# Altium PCB V1.pcbdoc
Units mil, origin at the board's own origin, x right, y up, seen from the top; angles counter-clockwise.
Board outline 2475 x 2490 mil, 2 copper layers (Top Layer, Bottom Layer); 53 components, 59 nets, 207 pads, 49 vias.
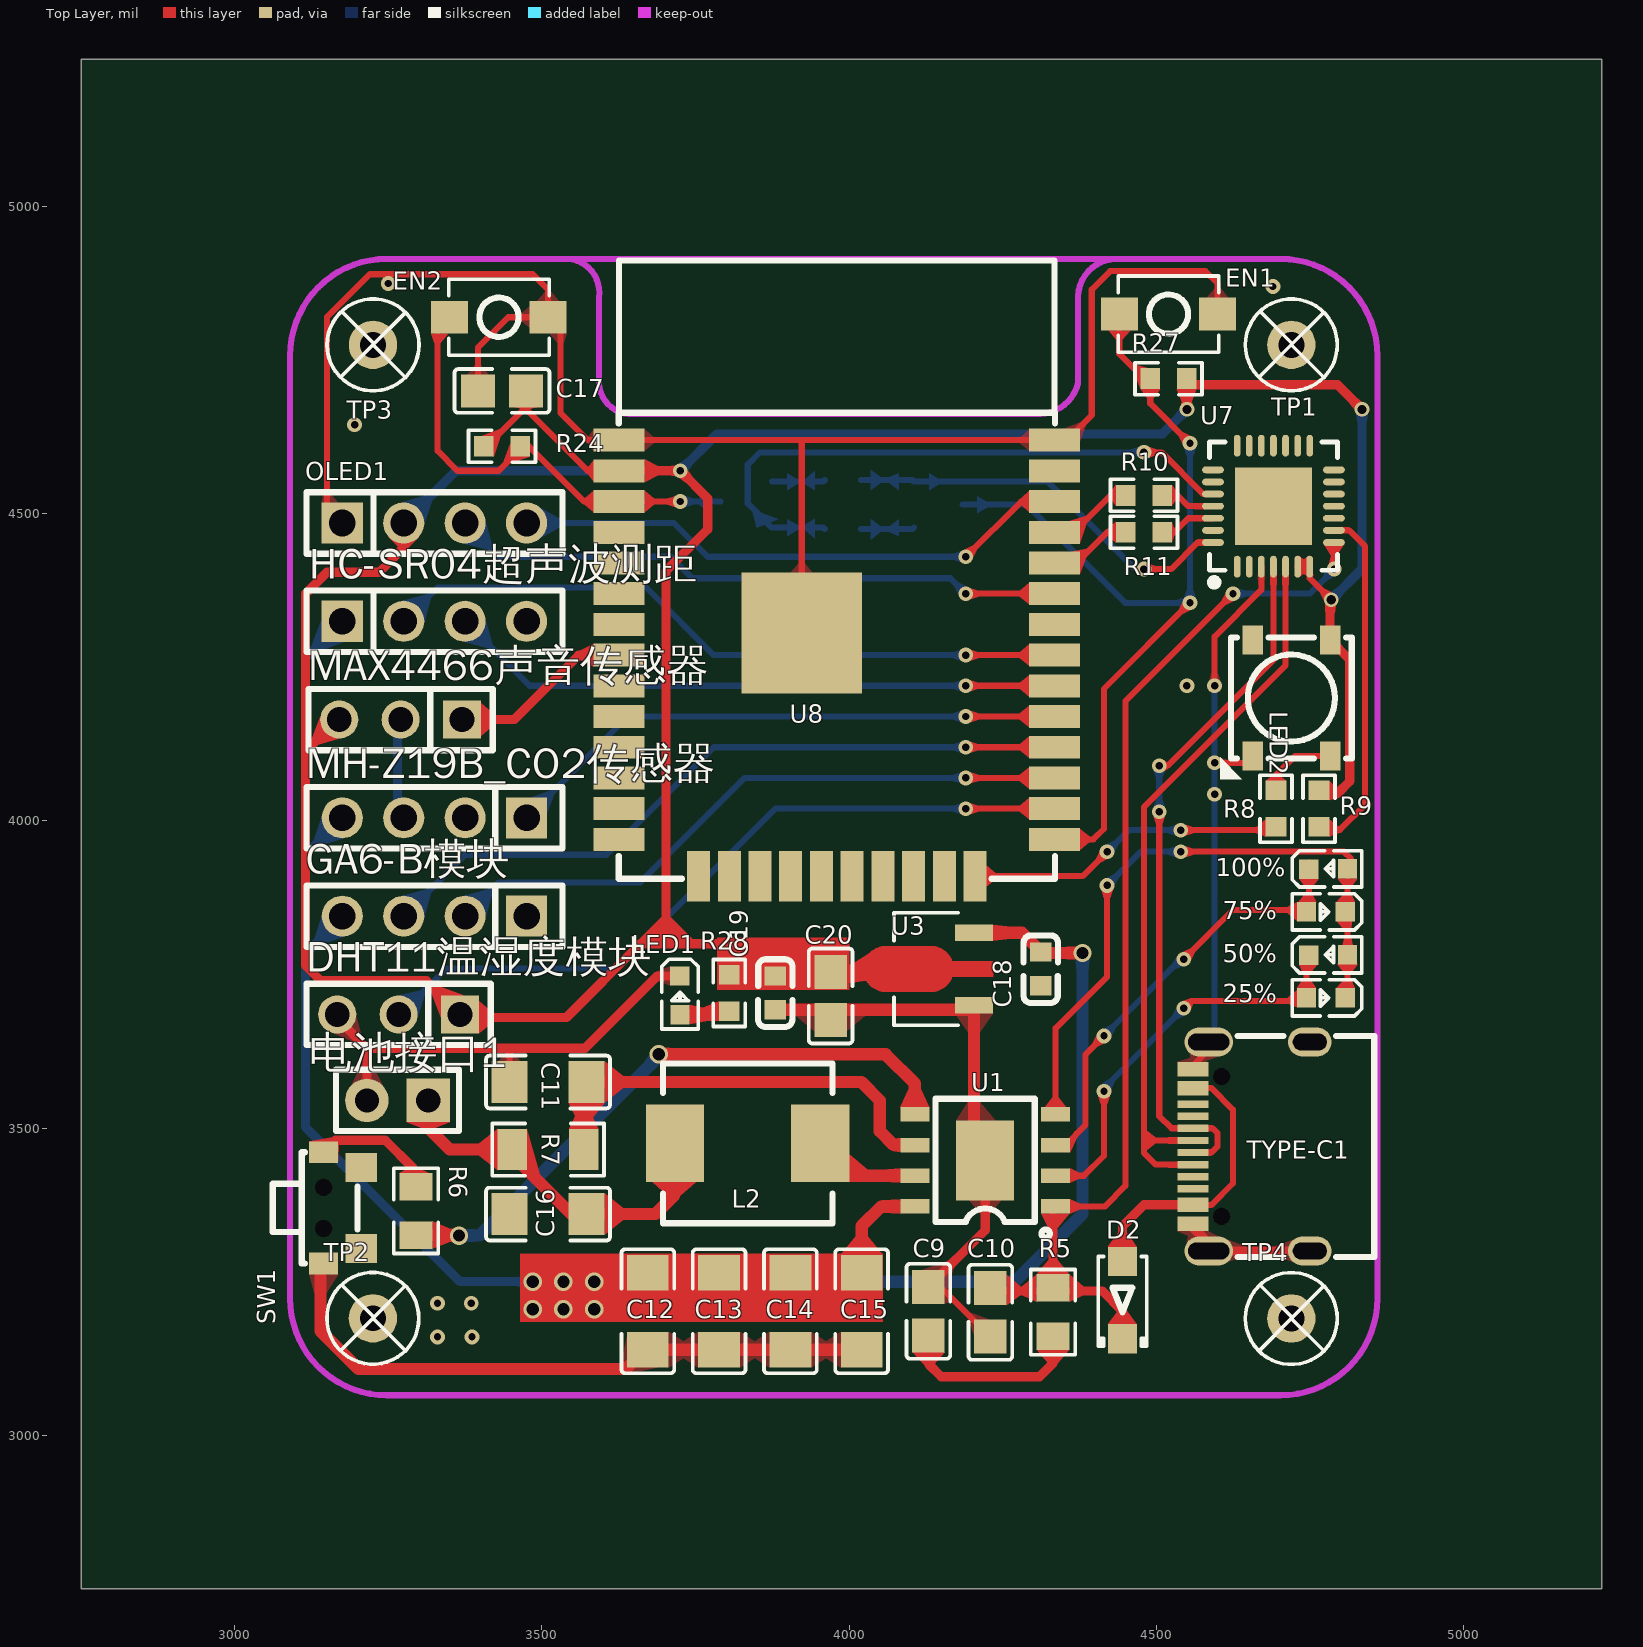
[diagram p0: Top Layer view]
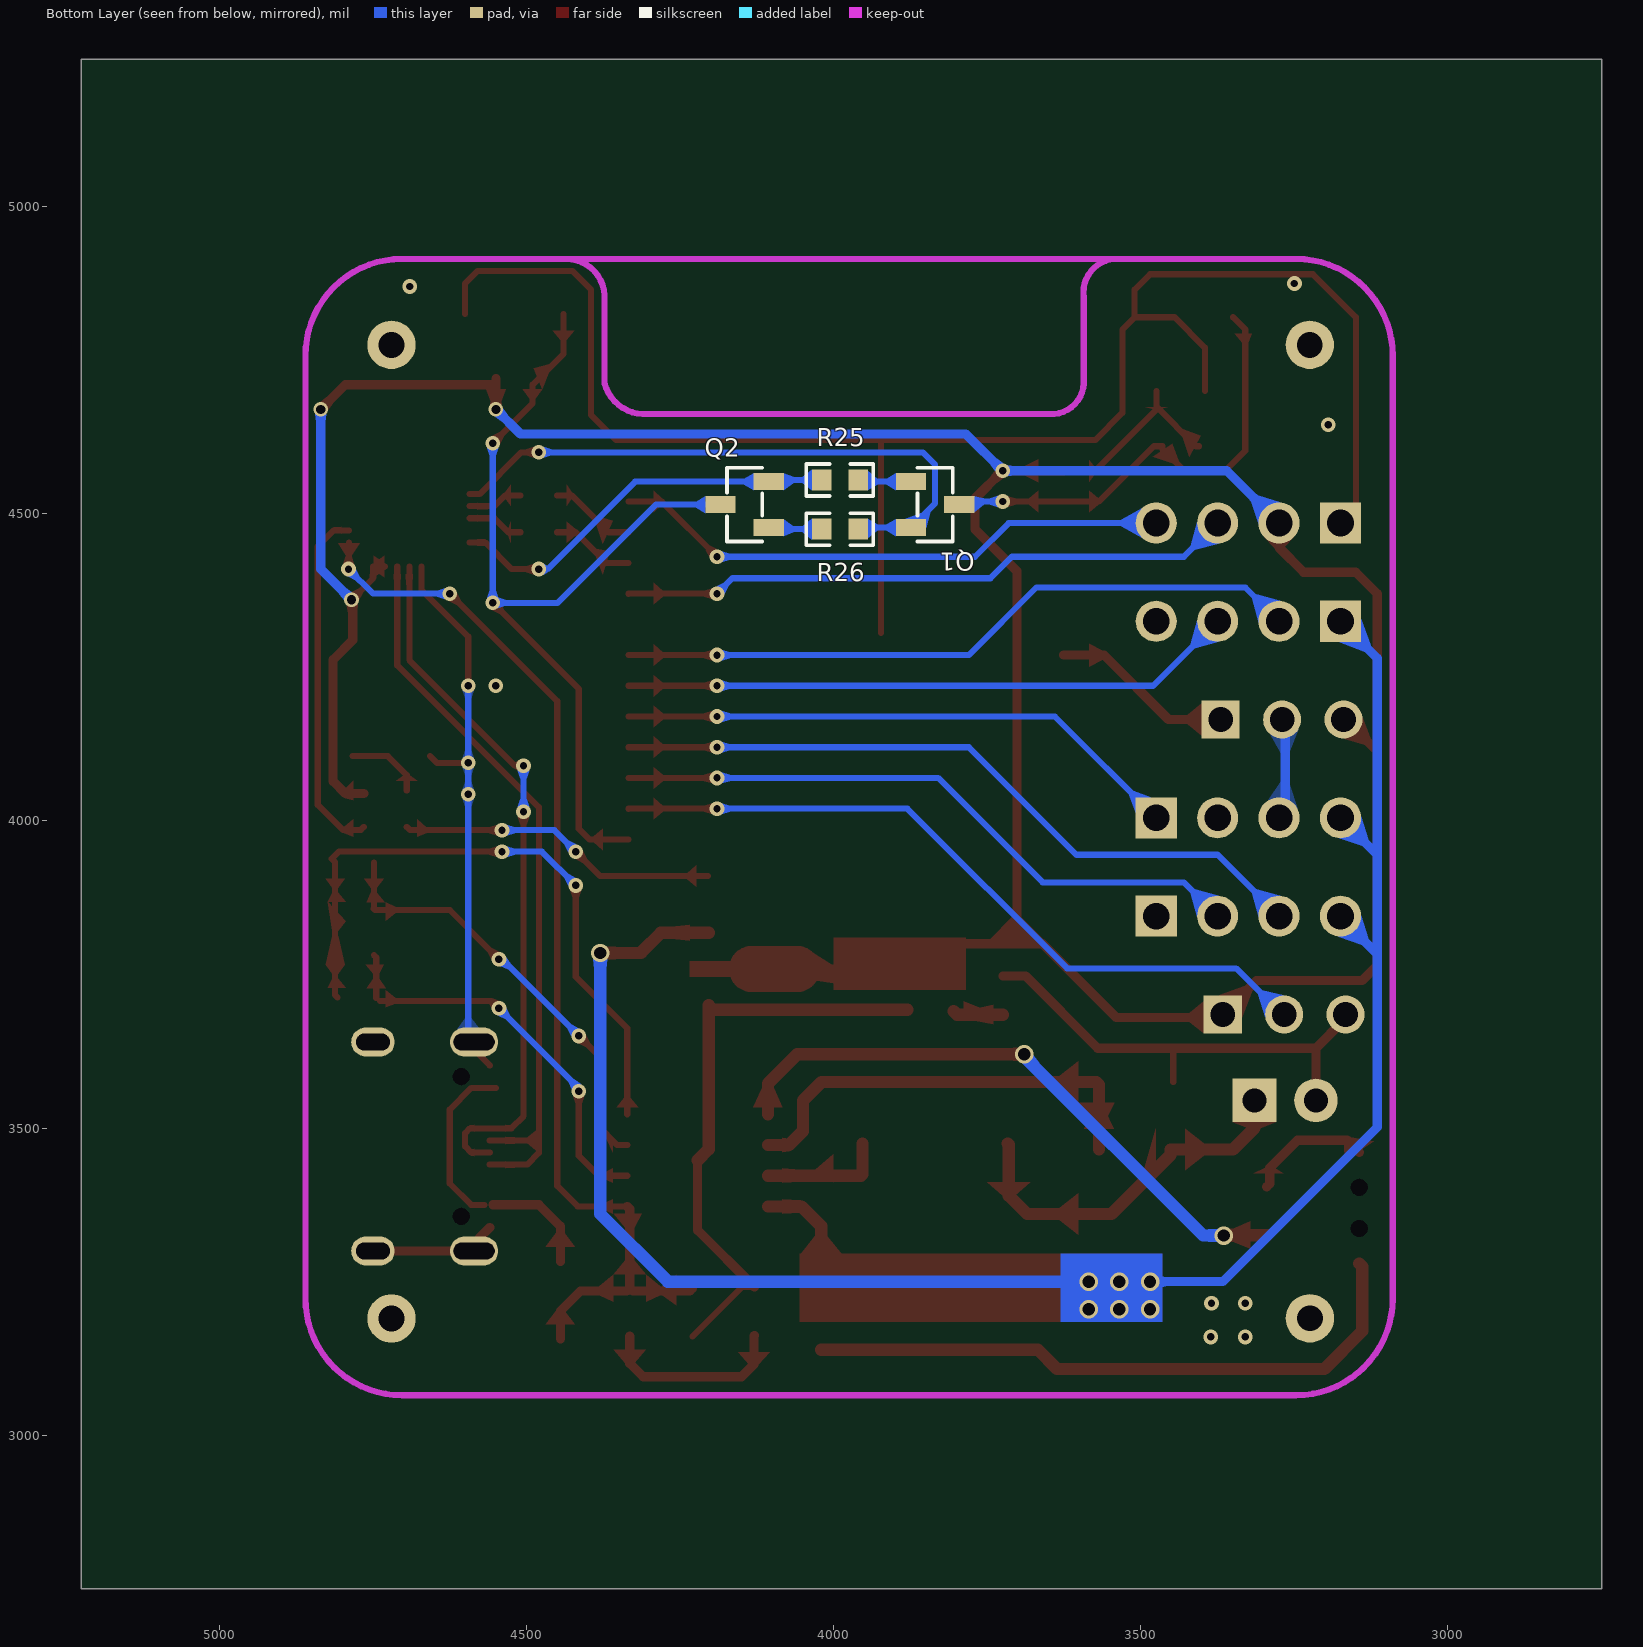
[diagram p1: Bottom Layer view, seen from below]

## Layer stack, top to bottom
Top Layer: signal copper (thickness not stored)
Dielectric: dielectric 12.6, FR-4, Dk 4.8
Bottom Layer: signal copper (thickness not stored)

## Board outline
5225,2750 2750,2750 2750,5240 5225,5240

## Components (designator, comment, footprint, x,y, rotation, side; value= is the part's Value field where it differs from the comment)
25% "19-217/GHC-YR1S2/3T" LED0603-RD 4776.1,3712.16 r180 top
50% "19-217/GHC-YR1S2/3T" LED0603-RD 4780,3781.74 r0 top
75% "19-217/GHC-YR1S2/3T" LED0603-RD 4776.1,3852.16 r180 top
100% "19-217/GHC-YR1S2/3T" LED0603-RD 4780,3921.74 r0 top
C9 "GRM21BR61H106KE43L" C0805 4129.07,3201.82 r270 top
C10 "GRM21BR61H106KE43L" C0805 4230,3200 r90 top
C11 "C3216X5R1V226MTJ00E" C1206 3510,3575 r0 top
C12 "C3216X5R1V226MTJ00E" C1206 3672.41,3201.82 r90 top
C13 "C3216X5R1V226MTJ00E" C1206 3788.44,3201.82 r90 top
C14 "C3216X5R1V226MTJ00E" C1206 3904.46,3201.82 r90 top
C15 "C3216X5R1V226MTJ00E" C1206 4020.49,3201.82 r90 top
C16 "C3216X5R1V226MTJ00E" C1206 3510,3360 r0 top
C17 "GRM21BR61H106KE43L" C0805 3435,4700 r180 top
C18 "104" C0603 4312.07,3758.96 r90 top
C19 "104" C0603 3880,3720 r90 top
C20 "GRM21BR61H106KE43L" C0805 3970,3715 r90 top
D2 "SS14_C2909920" SOD-123FL_L2.8-W1.8-LS3.7-RD 4445,3220 r90 top
DHT11温湿度模块 "B-2200S03P-A120" HDR-TH_3P-P2.54-V-F 3266.73,3685 r180 top
EN1 "TSA343G00-250J2" SW-SMD_L4.0-W2.9-LS5.0 4520,4825 r0 top
EN2 "TSA343G00-250J2" SW-SMD_L4.0-W2.9-LS5.0 3430,4820 r0 top
GA6-B模块 "2.54-1*4P母" HDR-TH_4P-P2.54-V-F 3325,3845 r180 top
HC-SR04超声波测距 "2.54-1*4P母" HDR-TH_4P-P2.54-V-F 3325,4325 r0 top
L2 "FXL0618-1R0-M" IND-SMD_L7.0-W6.6 3835,3475 r180 top
LED1 "19-217/GHC-YR1S2/3T" LED0603-RD 3724.58,3716.1 r270 top
LED2 "WS2812B-V5/W" LED-SMD_L5.0-W5.0-P3.20-LS5.4-TL 4720,4200 r270 top
MAX4466声音传感器 "B-2200S03P-A120" HDR-TH_3P-P2.54-V-F 3270,4165 r180 top
MH-Z19B_CO2传感器 "2.54-1*4P母" HDR-TH_4P-P2.54-V-F 3325,4005 r180 top
OLED1 "2.54-1*4P母" HDR-TH_4P-P2.54-V-F 3325,4485 r0 top
Q1 "S8050" SOT-23-3_L2.9-W1.3-P1.90-LS2.4-BR 3835,4515 r0 bottom
Q2 "S8050" SOT-23-3_L2.9-W1.3-P1.90-LS2.4-BR 4145,4515 r180 bottom
R5 "0805W8F200KT5E" R0805 4331.88,3200.56 r90 top
R6 "0805W8F1002T5E_C17414" R0805 3295,3365 r270 top
R7 "1206W4F500LT5E" R1206 3510,3465 r180 top
R8 "0603WAF0000T5E" R0603 4695,4020 r270 top
R9 "0603WAF4701T5E" R0603 4765,4020 r270 top
R10 "0603WAF1001T5E" R0603 4480,4530 r180 top
R11 "0603WAF1001T5E" R0603 4480,4470 r180 top
R24 "0603WAF1002T5E" R0603 3435,4610 r0 top
R25 "0603WAF1002T5E" R0603 3990,4555 r0 bottom
R26 "0603WAF1002T5E" R0603 3990,4475 r180 bottom
R27 "0603WAF1002T5E" R0603 4520,4720 r0 top
R28 "0603WAF1001T5E" R0603 3805,3720 r90 top
SW1 "TS24CA" SW-SMD_TS24CA 3175,3370 r90 top
TP1 "M2螺丝" M2螺丝 4720,4775 r0 top
TP2 "M2螺丝" M2螺丝 3224.8,3190.35 r0 top
TP3 "M2螺丝" M2螺丝 3225,4775 r0 top
TP4 "M2螺丝" M2螺丝 4720,3190 r0 top
TYPE-C1 "KH-TYPE-C-16P" USB-C-SMD_KH-TYPE-C-16P 4655,3470 r90 top
U1 "IP5306" ESOP-8_L4.9-W3.9-P1.27-LS6.0-BL-EP 4221.59,3447.41 r90 top
U3 "AMS1117-3.3_C880752" SOT-89-3_L4.5-W2.5-P1.50-LS4.2-BR 4149.95,3758.98 r0 top
U7 "CP2102-GMR" WQFN-28_L5.0-W5.0-P0.50-BL-EP3.2 4690.88,4512.41 r0 top
U8 "ESP32-WROOM-32D" WIFIM-SMD_ESP32-WROOM-32D 3980,4265 r270 top
电池接口1 "826629-2" HDR-TH_2P-P2.54-V-M-1 3265,3545 r180 top

## Footprints (in the part's own frame and the unit in brackets; to place one, negate y for a bottom-side part, rotate by r counter-clockwise, add the part's x,y. Pads: shape width x height; smd on the part's side, far side on the other; paste and mask are expansions set on the pad)
C0603 [mm]
  rect 0.8x0.9 smd paste+0 mask+0.051: 1(-0.7,0) 2(0.7,0)
  silkscreen extent -1.41,-0.71 1.39,0.72
C0805 [mm]
  rect 1.41x1.35 smd paste-100 mask+0.051: 1(-1,0) 2(1,0)
  silkscreen extent -1.96,-0.9 1.96,0.9
C1206 [mm]
  rect 1.485x1.728 smd paste-100 mask+0.051: 1(-1.593,0) 2(1.593,0)
  silkscreen extent -2.56,-1.09 2.56,1.09
ESOP-8_L4.9-W3.9-P1.27-LS6.0-BL-EP [mm]
  rect 0.6x1.2 smd paste+0 mask+0.051: 1(-1.905,-2.908) 2(-0.635,-2.908) 3(0.635,-2.908) 4(1.905,-2.908) 5(1.905,2.908) 6(0.635,2.908) 7(-0.635,2.908) 8(-1.905,2.908)
  rect 3.3x2.4 smd paste+0 mask+0.051: 9(0,0)
  silkscreen extent -3.2,-2.67 2.55,2.05
HDR-TH_2P-P2.54-V-M-1 [mm]
  rect 1.8x1.8 hole 1 paste+0 mask+0.051: 1(-1.27,0)
  round 1.8 hole 1 paste+0 mask+0.051: 2(1.27,0)
  silkscreen extent -2.54,-1.27 2.54,1.27
HDR-TH_3P-P2.54-V-F [mil]
  rect 62x62 hole 40.16 paste+0 mask+2: 1(-100,0)
  round 62 hole 40.16 paste+0 mask+2: 2(0,0) 3(100,0)
  silkscreen extent -150,-50 150,50
HDR-TH_4P-P2.54-V-F [mm]
  rect 1.7x1.7 hole 1.1 paste+0 mask+0.051: 1(-3.81,0)
  round 1.7 hole 1.1 paste+0 mask+0.051: 2(-1.27,0) 3(1.27,0) 4(3.81,0)
  silkscreen extent -5.29,-1.27 5.29,1.27
IND-SMD_L7.0-W6.6 [mm]
  rect 2.4x3.2 smd paste+0 mask+0.051: 1(-3,0) 2(3,0)
  silkscreen extent -3.5,-3.3 3.5,3.3
LED0603-RD [mm]
  rect 0.8x0.8 smd paste+0 mask+0.051: 1(-0.799,-0.003) 2(0.799,0.003)
  silkscreen extent -1.49,-0.75 1.39,0.76
LED-SMD_L5.0-W5.0-P3.20-LS5.4-TL [mm]
  rect 1.2x0.85 smd paste+0 mask+0.051: 1(-2.4,1.6) 2(-2.4,-1.6) 3(2.4,1.6) 4(2.4,-1.6)
  silkscreen extent -2.5,-2.95 3.35,2.5
M2螺丝 [mm]
  round 2 hole 1.07 mask+0.051: 1(0,0)
  silkscreen extent -1.9,-1.9 1.9,1.9
R0603 [mil]
  rect 31.75x34.02 smd paste-3937.01 mask+2: 1(-29.66,0) 2(29.66,0)
  silkscreen extent -55,-26 55,26
R0805 [mm]
  rect 1.133x1.377 smd paste-100 mask+0.051: 1(-1,0) 2(1,0)
  silkscreen extent -1.76,-0.92 1.76,0.92
R1206 [mil]
  rect 47.54x66.97 smd paste-3937.01 mask+2: 1(-58.22,0) 2(58.22,0)
  silkscreen extent -91,-42 91,42
SOD-123FL_L2.8-W1.8-LS3.7-RD [mm]
  rect 1.2x1.2 smd paste+0 mask+0.051: 1(-1.6,0) 2(1.6,0)
  silkscreen extent -1.9,-1 1.8,1
SOT-23-3_L2.9-W1.3-P1.90-LS2.4-BR [mm]
  rect 1.25x0.7 smd paste+0 mask+0.051: 1(1,-0.95) 2(1,0.95) 3(-1,0)
  silkscreen extent -0.73,-1.53 0.73,1.53
SOT-89-3_L4.5-W2.5-P1.50-LS4.2-BR [mm]
  rect 1.575x0.672 smd paste+0 mask+0.051: 1(1.356,-1.5) 3(1.356,1.5)
  Top Layer region: -2.283,0.95 -0.429,0.95 -0.384,0.949 -0.34,0.946 -0.296,0.94 -0.252,0.933 -0.208,0.924 -0.165,0.912 -0.123,0.899 -0.081,0.884 -0.04,0.866 0,0.847 0.04,0.826 0.078,0.803 0.115,0.779 0.151,0.752 0.185,0.724 0.219,0.695 0.251,0.664 0.281,0.631 0.31,0.597 0.337,0.562 0.362,0.525 0.386,0.488 0.408,0.449 0.428,0.409 0.447,0.33 2.144,0.33 2.144,-0.33 0.447,-0.33 0.428,-0.409 0.408,-0.449 0.386,-0.488 0.362,-0.526 0.337,-0.562 0.31,-0.597 0.281,-0.631 0.251,-0.664 0.219,-0.695 0.185,-0.725 0.151,-0.753 0.115,-0.779 0.078,-0.804 0.04,-0.827 0,-0.848 -0.04,-0.867 -0.081,-0.884 -0.123,-0.899 -0.165,-0.913 -0.208,-0.924 -0.252,-0.934 -0.296,-0.941 -0.34,-0.946 -0.384,-0.949 -0.429,-0.95 -2.283,-0.95 -2.328,-0.949 -2.372,-0.946 -2.416,-0.941 -2.46,-0.934 -2.504,-0.924 -2.547,-0.913 -2.589,-0.899 -2.631,-0.884 -2.672,-0.867 -2.713,-0.848 -2.752,-0.827 -2.79,-0.804 -2.827,-0.779 -2.863,-0.753 -2.898,-0.725 -2.931,-0.695 -2.963,-0.664 -2.993,-0.631 -3.022,-0.597 -3.049,-0.562 -3.075,-0.526 -3.098,-0.488 -3.12,-0.449 -3.141,-0.409 -3.159,-0.369 -3.175,-0.327 -3.189,-0.285 -3.202,-0.242 -3.212,-0.199 -3.22,-0.155 -3.227,-0.111 -3.231,-0.067 -3.233,-0.022 -3.233,0.022 -3.231,0.067 -3.227,0.111 -3.22,0.155 -3.212,0.199 -3.202,0.242 -3.189,0.285 -3.175,0.327 -3.159,0.369 -3.141,0.409 -3.12,0.449 -3.098,0.488 -3.075,0.525 -3.049,0.562 -3.022,0.597 -2.993,0.631 -2.963,0.664 -2.931,0.695 -2.898,0.724 -2.863,0.752 -2.827,0.779 -2.79,0.803 -2.752,0.826 -2.713,0.847 -2.672,0.866 -2.631,0.884 -2.589,0.899 -2.547,0.912 -2.504,0.924 -2.46,0.933 -2.416,0.94 -2.372,0.946 -2.328,0.949
  silkscreen extent -1.95,-2.33 0.7,2.33
SW-SMD_L4.0-W2.9-LS5.0 [mm]
  rect 1.53x1.36 smd paste+0 mask+0.051: 1(-2.035,0) 2(2.035,0)
  silkscreen extent -2.08,-1.58 2.08,1.58
SW-SMD_TS24CA [mm]
  rect 0.9x1.2 smd paste+0 mask+0.051: 1(-2.3,0.775) 2(2.3,0.775)
  rect 1.2x1.3 smd paste+0 mask+0.051: 3(-1.675,-0.775) 4(1.675,-0.775)
  Multi-Layer board cut-out: -0.85,0.425 -0.698,0.46 -0.576,0.557 -0.509,0.697 -0.509,0.853 -0.576,0.993 -0.698,1.09 -0.85,1.125 -0.85,1.125 -1.002,1.09 -1.124,0.993 -1.191,0.853 -1.191,0.697 -1.124,0.557 -1.002,0.46 -0.85,0.425
  Multi-Layer board cut-out: 0.85,0.425 1.002,0.46 1.124,0.557 1.191,0.697 1.191,0.853 1.124,0.993 1.002,1.09 0.85,1.125 0.85,1.125 0.698,1.09 0.576,0.993 0.509,0.853 0.509,0.697 0.576,0.557 0.698,0.46 0.85,0.425
  silkscreen extent -2.3,-0.62 2.3,2.88
USB-C-SMD_KH-TYPE-C-16P [mm]
  oval 1.2x2 hole 0.7 slot 1.7 at 90 deg paste+0 mask+0.051: 1(-4.32,1.765) 2(4.32,1.765)
  oval 1.2x1.8 hole 0.7 slot 1.4 at 90 deg paste+0 mask+0.051: 3(-4.32,-2.415) 4(4.32,-2.415)
  rect 0.3x1.3 smd paste-100 mask+0.05: A1(-3.35,2.415) A4(-2.55,2.415) A5(-1.25,2.415) A6(-0.25,2.415) A7(0.25,2.415) A8(1.25,2.415) A9(2.55,2.415) A12(3.35,2.415) B1(3.05,2.415) B4(2.25,2.415) B5(1.75,2.415) B6(0.75,2.415) B7(-0.75,2.415) B8(-1.75,2.415) B9(-2.25,2.415) B12(-3.05,2.415)
  Multi-Layer board cut-out: -2.89,0.885 -2.738,0.92 -2.616,1.017 -2.549,1.157 -2.549,1.313 -2.616,1.453 -2.738,1.55 -2.89,1.585 -2.89,1.585 -3.042,1.55 -3.164,1.453 -3.231,1.313 -3.231,1.157 -3.164,1.017 -3.042,0.92 -2.89,0.885
  Multi-Layer board cut-out: 2.89,0.885 3.042,0.92 3.164,1.017 3.231,1.157 3.231,1.313 3.164,1.453 3.042,1.55 2.89,1.585 2.89,1.585 2.738,1.55 2.616,1.453 2.549,1.313 2.549,1.157 2.616,1.017 2.738,0.92 2.89,0.885
  silkscreen extent -4.57,-5.08 4.57,0.57
WIFIM-SMD_ESP32-WROOM-32D [mm]
  rect 0.95x2.1 smd paste+0 mask+0.051: 1(-9.015,-9) 2(-7.745,-9) 3(-6.475,-9) 4(-5.205,-9) 5(-3.935,-9) 6(-2.665,-9) 7(-1.395,-9) 8(-0.125,-9) 9(1.145,-9) 10(2.415,-9) 11(3.685,-9) 12(4.955,-9) 13(6.225,-9) 14(7.495,-9) 25(7.495,9) 26(6.225,9) 27(4.955,9) 28(3.685,9) 29(2.415,9) 30(1.145,9) 31(-0.125,9) 32(-1.395,9) 33(-2.665,9) 34(-3.935,9) 35(-5.205,9) 36(-6.475,9) 37(-7.745,9) 38(-9.015,9)
  rect 2.1x0.95 smd paste+0 mask+0.051: 15(9.015,-5.715) 16(9.015,-4.445) 17(9.015,-3.175) 18(9.015,-1.905) 19(9.015,-0.635) 20(9.015,0.635) 21(9.015,1.905) 22(9.015,3.175) 23(9.015,4.445) 24(9.015,5.715)
  rect 5x5 smd paste+0 mask+0.051: 39(-1.045,-1.45)
  silkscreen extent -16.44,-9.02 9.12,9.02
WQFN-28_L5.0-W5.0-P0.50-BL-EP3.2 [mm]
  oval 0.28x0.9 smd paste-100 mask+0.051: 1(-1.501,-2.5) 2(-1.001,-2.5) 3(-0.501,-2.5) 4(0,-2.5) 5(0.5,-2.5) 6(1.001,-2.5) 7(1.501,-2.5) 15(1.501,2.5) 16(1.001,2.5) 17(0.5,2.5) 18(0,2.5) 19(-0.501,2.5) 20(-1.001,2.5) 21(-1.501,2.5)
  oval 0.9x0.28 smd paste-100 mask+0.051: 8(2.5,-1.501) 9(2.5,-1.001) 10(2.5,-0.501) 11(2.5,0) 12(2.5,0.5) 13(2.5,1.001) 14(2.5,1.501) 22(-2.5,1.501) 23(-2.5,1.001) 24(-2.5,0.5) 25(-2.5,0) 26(-2.5,-0.501) 27(-2.5,-1.001) 28(-2.5,-1.501)
  rect 3.2x3.2 smd paste-100 mask+0.051: 29(0,0)
  silkscreen extent -2.65,-3.3 2.65,2.65

## Via types
v1: diameter 24, hole 12, Top Layer to Bottom Layer, 35 vias
v2: diameter 30, hole 20, Top Layer to Bottom Layer, 9 vias
v3: diameter 24, hole 15, Top Layer to Bottom Layer, 3 vias
v4: diameter 24.02, hole 12.01, Top Layer to Bottom Layer, 2 vias

## Nets (pads, with @x,y where several pads share a name; then routed paths per layer and width w, separated by ;. In a path a pad name is that pad's centre, name@x,y a point inside that pad or via, vN(x,y) a via of type N, cw(c..) or ccw(c..) an arc to the next point about the centre after c; other vN are vias at no path point)
3V3: C17.1 C19.2 C20.2 DHT11温湿度模块.1 LED2.1 MAX4466声音传感器.3 OLED1.2 R9.1 R24.1 R27.2 R28.2 U7.6 U7.7 U8.2 | length 5744.1
  Top Layer w10: R24.1 3410.34,4610 C17.1@3474.37,4674.03 ; C17.1 C17.1@3474.37,4674.03 ; U8.2 3574.33,4569.93 3474.37,4669.89 C17.1@3474.37,4674.03 ; U7.6 U7.7 4749.97,4395.03 v3(4785,4360) ; v3@4835,4665 v3(4835,4670)
  Top Layer w15: MAX4466声音传感器.3@3166.73,4165 3115,4113.27 ; OLED1.2 3275,4445 3235,4405 3150,4405 3115,4370 3115,4113.27 ; DHT11温湿度模块.1@3345,3680 3540,3680 3660,3800 3701.79,3800 ; DHT11温湿度模块.1 3311.73,3740 3140,3740 3115,3765 3115,4113.27 ; U8.2 3724.93,4569.93 v1(3725,4570) 3770,4525 3770,4475 3701.79,4406.79 3701.79,3800 ; 3820,3800 3701.79,3800 ; R27.2 R27.2@4549.66,4710 ; v3(4550,4670) 4549.66,4670.34 R27.2@4549.66,4710 ; R9.1@4765,4044.66 4795,4044.66 4815,4064.66 4815,4262.48 LED2.1 4782.99,4357.99 v3(4785,4360) ; v3(4835,4670) 4795,4710 R27.2@4549.66,4710
  Top Layer w20: R28.2 4087.24,3749.66 4096.56,3758.97
  Bottom Layer w15: OLED1.2 3360,4570 v1(3725,4570) 3785,4630 4510,4630 v3(4550,4670) ; v3(4785,4360) 4835,4410 v3(4835,4670)
5V: C10.2 D2.1 R5.2 U1.1 U7.8 | length 1813.5
  Top Layer w10: U1.1 4416.71,3372.41 4450,3405.7 4450,4195 v1(4625,4370) ; U7.8 4789.3,4405 4790,4405.7 v1(4790,4410)
  Top Layer w15: C10.2 4234.44,3234.93 4326.88,3234.93 R5.2 ; U1.1 4331.88,3368.21 R5.2 ; D2.1 4445,3202.01 4412.07,3234.93 4336.88,3234.93 R5.2
  Bottom Layer w10: v1(4625,4370) 4750,4370 v1(4790,4410)
$1N559: R6.2 U1.5 | length 1006.2
  Top Layer w20: R6.2 3364.37,3325.63 v2(3365,3325) ; v2(3690,3620) 4059.5,3620 4107.09,3572.41 U1.5
  Bottom Layer w20: v2(3365,3325) 3398.28,3325 3690,3616.72 v2(3690,3620)
$1N562: C11.2 R7.1 U1.6 | length 718
  Top Layer w20: R7.1 3568.22,3570.52 C11.2 4020,3575 4050,3545 4050,3495 4072.59,3472.41 U1.6
$1N563: L2.1 U1.7 | length 205.1
  Top Layer w20: L2.1 3953.11,3425 3955.69,3422.41 U1.7
$1N566: C9.2 R5.1 | length 311.4
  Top Layer w15: C9.2 4130,3161.52 4130,3115 4150,3095 4310,3095 4331.88,3116.88 R5.1
$1N567: 25%.2 50%.1 U1.2 | length 656.2
  Top Layer w10: U1.2 4382.41,3422.41 4415,3455 v1(4415,3560) ; v1(4545,3695) 4557.03,3707.03 25%.2@4738.72,3707.03 ; 25%.2 4744.62,3777.7 50%.1
  Bottom Layer w10: v1(4415,3560) 4415,3565 v1(4545,3695)
$1N568: 75%.2 100%.1 U1.3 | length 714.8
  Top Layer w10: U1.3 4352.41,3472.41 4385,3505 4385,3620 v1(4415,3650) ; v1(4545,3775) 4625,3855 4746.7,3855 75%.2@4748.72,3857.03 ; 75%.2@4748.52,3857.03 100%.1 100%.1@4748.52,3932.5
  Bottom Layer w10: v1(4415,3650) 4540,3775 v1(4545,3775)
$1N569: 25%.1 50%.2 75%.1 100%.2 U1.4 | length 1062.2
  Top Layer w10: U1.4 4336.09,3662.41 4420,3746.32 v1(4420,3895) ; v1(4540,3950) 4805.58,3950 4817.14,3938.44 4811.67,3932.97 4811.67,3716.4 25%.1
  Bottom Layer w10: v1(4420,3895) 4475,3950 v1(4540,3950)
$1N570: R6.1 SW1.2 | length 204.9
  Top Layer w15: SW1.2 3163.94,3480 3245,3480 3290,3435 3290,3409.37 R6.1
$1N4383: R9.2 U7.9 | length 576.3
  Top Layer w10: R9.2 4770,3985.34 4799.14,3985.34 4840,4026.2 4840,4447.03 4814.02,4473.01 U7.9
$1N4471: R10.1 U7.25 | length 90.1
  Top Layer w10: R10.1 4534.66,4530 4552.25,4512.41 U7.25
$1N4541: R11.1 U7.26 | length 92.2
  Top Layer w10: R11.1 4529.66,4470 4552.37,4492.71 U7.26
$1N5646: Q1.1 R25.1 | length 87
  Bottom Layer w10: Q1.1 3957.74,4552.4 R25.1
$1N5682: Q2.1 R26.1 | length 87
  Bottom Layer w10: R26.1 4103.03,4475 Q2.1
$1N8242: LED1.2 R28.1 | length 82.7
  Top Layer w20: LED1.2 3799.28,3684.62 R28.1
$1N8352: LED2.3 R8.1 | length 125.8
  Top Layer w10: R8.1 4695,4074.66 4725.85,4105.51 LED2.3
CLK: U8.20
CMD: U8.19
D+: TYPE-C1.A6 TYPE-C1.B6 U7.4 | length 1152.1
  Top Layer w10: v4(4505,4015) 4505,3519.45 4524.92,3499.53 TYPE-C1.B6 4592.2,3499.53 4600,3491.73 4600,3470.16 4590,3460.16 TYPE-C1.A6 ; v4(4505,4090) 4519.14,4090 4690.87,4261.73 U7.4
  Bottom Layer w10: v4(4505,4015) v4(4505,4090)
D-: TYPE-C1.A7 TYPE-C1.B7 U7.5 | length 1217.7
  Top Layer w10: TYPE-C1.B7 4499,3440.47 4480,3459.47 4480,3479.84 ; TYPE-C1.A7 4480,3479.84 ; U7.5 4710.57,4253.09 4480,4022.52 4480,3479.84
DTR: Q2.2 R25.2 U7.28 | length 650.8
  Top Layer w10: v1(4480,4410) 4524.15,4410 4567.45,4453.31 U7.28
  Bottom Layer w10: R25.2 4103.03,4555 Q2.2 4323.46,4552.4 4465.86,4410 v1(4480,4410)
EN: EN2.1 Q1.3 R24.2 U8.3 | length 751.6
  Top Layer w10: EN2.1 3330,4800.12 3330,4602.54 3362.54,4570 3429.66,4570 3464.66,4605 R24.2 3478.8,4610 3568.88,4519.93 U8.3 v1@3720,4519.93
  Bottom Layer w10: v1(3725,4520) Q1.3@3790.63,4520
GND: C9.1 C10.1 C11.1 C12.1 C13.1 C14.1 C15.1 C16.1 C17.2 C18.1 C19.1 C20.1 DHT11温湿度模块.3 EN1.2 EN2.2 GA6-B模块.1 HC-SR04超声波测距.4 LED1.1 LED2.4 MAX4466声音传感器.2 MH-Z19B_CO2传感器.3 OLED1.1 SW1.1 TYPE-C1.1 TYPE-C1.2 TYPE-C1.3 TYPE-C1.4 TYPE-C1.A1 TYPE-C1.A12 TYPE-C1.B1 TYPE-C1.B12 U1.9 U3.1 U7.3 U8.1 U8.15 U8.38 U8.39 电池接口1.2 | length 6921.9
  Top Layer w10: OLED1.1 3150,4510 3150,4820 3220,4890 3485,4890 3510.12,4864.88 EN2.2 ; C17.2 3395.63,4770.51 3445.12,4820 EN2.2 ; 3443.54,3630 3447.3,3626.24 C11.1 ; U8.39 3922.93,4619.44 3922.45,4619.93 ; C9.1 4149.44,3241.19 C10.1 ; TYPE-C1.A12 4585.51,3627.48 TYPE-C1.2 ; v1(4595,4094.52) 4646.02,4094.52 LED2.4 ; v1(4595,4220) 4595,4300 4671.17,4376.17 U7.3 ; EN1.2 4600,4825.12 4600,4875 4580,4895 4425,4895 4395,4865 4395,4660.6 4354.32,4619.93 U8.38 3922.45,4619.93 ; EN2.2 3530.12,4800 3530.12,4664.11 3574.3,4619.93 U8.1 3922.45,4619.93
  Top Layer w15: DHT11温湿度模块.3@3170,3675 3215,3630 ; 电池接口1.2 3215,3630 ; LED1.1 3687.57,3747.57 3570,3630 3443.54,3630 3215,3630 ; C9.1 4221.59,3333.71 U1.9 ; TYPE-C1.A1 4596.81,3301.22 TYPE-C1.1@4595.51,3299.92 ; TYPE-C1.1 TYPE-C1.1@4595.51,3299.92 ; TYPE-C1.3 TYPE-C1.1@4595.51,3299.92
  Top Layer w20: SW1.1 3139.49,3274.45 3139.49,3169.63 3201.23,3107.89 3636.4,3107.89 3667.63,3139.12 C12.1 C13.1 C14.1 C15.1 ; C19.1 4195.86,3692.44 U3.1 4203.35,3465.66 U1.9
  Bottom Layer w10: TYPE-C1.2 4595,3649.57 v1(4595,4043.45) v1(4595,4094.52) v1(4595,4220)
  Bottom Layer w15: MAX4466声音传感器.2@3266.73,4165 3265,4163.27 3265,4015 MH-Z19B_CO2传感器.3
  other v1: 3330,3160 3386.23,3160 3330,3215 3385,3215 4550,4220 3195,4645 4690,4870 3250,4875
IO0: EN1.1 Q2.3 R27.1 U8.25 | length 1468.2
  Top Layer w10: U8.25 4397.66,3969.93 4415,3987.26 4415,4215 v1(4555,4355) ; EN1.1 4439.88,4760.46 4490.34,4710 4490.34,4679.66 v1(4555,4615)
  Bottom Layer w10: Q2.3 4289.37,4515 4449.37,4355 v1(4555,4355) v1(4555,4615)
IO2: R8.2 U8.24 | length 523.2
  Top Layer w10: U8.24 4380.09,3910.09 v1(4420,3950) ; v1(4540,3985) 4689.66,3985 R8.2
  Bottom Layer w10: v1(4420,3950) 4455,3985 v1(4540,3985)
IO4: DHT11温湿度模块.2 U8.26 | length 1210.2
  Top Layer w10: v1(4190,4020) 4334.25,4020 U8.26
  Bottom Layer w10: DHT11温湿度模块.2@3265,3680 3345,3760 3620,3760 3880,4020 v1(4190,4020)
IO5: MH-Z19B_CO2传感器.1 U8.29 | length 927.7
  Top Layer w10: v1(4190,4170) 4334.25,4170 U8.29
  Bottom Layer w10: MH-Z19B_CO2传感器.1 3640,4170 v1(4190,4170)
IO12: U8.14
IO13: U8.16
IO14: U8.13
IO15: U8.23
IO16: GA6-B模块.2 U8.27 | length 1052.6
  Top Layer w10: v1(4190,4070) 4190.07,4069.93 U8.27
  Bottom Layer w10: GA6-B模块.2 3430,3900 3660,3900 3830,4070 v1(4190,4070)
IO17: GA6-B模块.3 U8.28 | length 1173.3
  Top Layer w10: v1(4190,4120) 4334.25,4120 U8.28
  Bottom Layer w10: GA6-B模块.3 3375,3945 3605,3945 3780,4120 v1(4190,4120)
IO18: HC-SR04超声波测距.3 U8.30 | length 1002.8
  Top Layer w10: v1(4190,4220) 4334.25,4220 U8.30
  Bottom Layer w10: HC-SR04超声波测距.3 3480,4220 v1(4190,4220)
IO19: HC-SR04超声波测距.2 U8.31 | length 1127.7
  Top Layer w10: v1(4190,4270) 4334.25,4270 U8.31
  Bottom Layer w10: HC-SR04超声波测距.2 3330,4380 3670,4380 3780,4270 v1(4190,4270)
IO21: OLED1.3 U8.33 | length 1007
  Top Layer w10: v1(4190,4370) 4334.25,4370 U8.33
  Bottom Layer w10: OLED1.3 3430,4430 3710,4430 3745,4395 4165,4395 v1(4190,4370)
IO22: OLED1.4 U8.36 | length 919.4
  Top Layer w10: v1(4190,4430) 4279.93,4519.93 U8.36
  Bottom Layer w10: OLED1.4 3715,4485 3770,4430 v1(4190,4430)
IO23: U8.37
IO25: U8.10
IO26: U8.11
IO27: U8.12
IO32: MAX4466声音传感器.1 U8.8 | length 299.1
  Top Layer w15: MAX4466声音传感器.1 3454.91,4165 3559.84,4269.93 U8.8
IO33: U8.9
IO34: U8.6
IO35: U8.7
RTS: Q1.2 R26.2 U7.24 | length 999.6
  Top Layer w10: v1(4480,4600) 4508.73,4600 4576.62,4532.11 U7.24
  Bottom Layer w10: R26.2 3957.74,4477.6 Q1.2 3835,4516.97 3835,4580 3855,4600 v1(4480,4600)
RXD0: R11.2 U8.34 | length 136.8
  Top Layer w10: U8.34 4370.27,4419.93 4420.34,4470 R11.2
SD0: U8.21
SD1: U8.22
SD2: U8.17
SD3: U8.18
TXD0: R10.2 U8.35 | length 140.9
  Top Layer w10: U8.35 4366.12,4469.93 4426.2,4530 R10.2
VBUS: D2.2 TYPE-C1.A4 TYPE-C1.A9 TYPE-C1.B4 TYPE-C1.B9 | length 462.2
  Top Layer w10: TYPE-C1.A9@4549.93,3565.4 4589.78,3565.4 4625,3530.18 4625,3409.76 4590.24,3375 TYPE-C1.A4@4568.26,3375
  Top Layer w15: D2.2 4445,3340 4480,3375 TYPE-C1.A4@4554.53,3375
VCCBAT: C16.2 L2.2 R7.2 电池接口1.1 | length 606.5
  Top Layer w20: 电池接口1.1 3315,3500 3350,3465 R7.2 3451.78,3455.92 3547.7,3360 C16.2 3685,3360 3715,3390 3715,3473.11 L2.2
VIN: C12.2 C13.2 C14.2 C15.2 C18.2 GA6-B模块.4 HC-SR04超声波测距.1 MH-Z19B_CO2传感器.4 U1.8 U3.3 | length 3667.5
  Top Layer w20: v2(3585,3250) 3657.89,3250 C12.2 C13.2 C14.2 C15.2 4020.49,3340.49 4052.41,3372.41 U1.8 ; U3.3 4281.35,3818.03 4312.07,3787.31 C18.2 4313.6,3785 v2(4380,3785)
  Bottom Layer w15: GA6-B模块.4 3175,3843.34 3115,3783.34 ; MH-Z19B_CO2传感器.4 3115,3945 ; HC-SR04超声波测距.1 3115,4265 3115,3945 ; v2(3585,3250) v2(3535,3250) v2(3485,3250) 3366.52,3250 3115,3501.52 3115,3783.34 ; 3115,3783.34 3115,3945
  Bottom Layer w20: v2(3585,3250) 4270,3250 4380,3360 v2(4380,3785)
  other v2: 3485,3205 3535,3205 3585,3205
VN: U8.5
VP: U8.4
"": LED2.2 MH-Z19B_CO2传感器.2 SW1.3 SW1.4 TP1.1 TP2.1 TP3.1 TP4.1 TYPE-C1.A5 TYPE-C1.A8 TYPE-C1.B5 TYPE-C1.B8 U7.1 U7.2 U7.10 U7.11 U7.12 U7.13 U7.14 U7.15 U7.16 U7.17 U7.18 U7.19 U7.20 U7.21 U7.22 U7.23 U7.27 U7.29 U8.32

## Polygon pours and split planes (outlines as drawn)
GND on Bottom Layer (solid, remove dead copper, pour order 0): 3000,3005 4970,3005 4970,4990 3000,4990
GND on Top Layer (solid, remove dead copper, pour order 1): 3005,3000 4975,3000 4975,4990 3005,4990

## Keep-outs
Board Outline Layer:
  lines w10 net "": 3535,4915 cw(c3538.75,4860.4) 3592.88,4852.38 3592.88,4712.38 ccw(c3645.52,4714.92) 3648.55,4662.31 ; 3647.88,4662.31 4307.88,4662.31 ; 4302.88,4662.38 ccw(c4307.98,4729.25) 4372.88,4712.38 ; 4372.88,4712.74 4372.88,4852.74 ; 4372.88,4847.38 cw(c4435.92,4851.82) 4435,4915 ; 3090,3222.48 ccw(c3247.48,3222.48) 3247.48,3065 4702.52,3065 ccw(c4702.52,3222.48) 4860,3222.48 4860,4757.52 ccw(c4702.52,4757.52) 4702.52,4915 3247.48,4915 ccw(c3247.48,4757.52) 3090,4757.52 3090,3222.48

## Other copper
Top Layer:
  region net 3V3: 3785,3725 4000,3725 4000,3810 3785,3810
  region net VIN: 3465,3185 4055,3185 4055,3295 3465,3295
  region net D-: 4480,3500 4505,3480 4480,3460
  region net 3V3: 3651.28,3800 3701.79,3850.52 3701.79,3851.02 3752.81,3800
  region net $1N566: 4122.5,3115 4137.5,3115 4155.64,3134.7 4103.75,3134.7
  region net 5V: 4279.07,3227.43 4279.07,3242.43 4256.57,3261.18 4256.57,3211.61
  region net 5V: 4282.28,3227.43 4304.78,3217.64 4304.78,3261.18 4282.28,3242.43
  region net 5V: 4381.49,3242.43 4358.99,3261.18 4358.99,3217.64 4381.49,3227.43
  region net 5V: 4324.38,3284.73 4305.63,3262.23 4358.13,3262.23 4339.38,3284.73
  region net $1N566: 4339.38,3116.88 4358.13,3138.9 4305.63,3138.9 4324.38,3116.88
  region net $1N567: 4713.87,3712.03 4713.87,3702.03 4728.87,3696.28 4728.87,3724.53
  region net $1N567: 4739.62,3742.78 4728.87,3727.78 4760.37,3727.78 4749.62,3742.78
  region net $1N569: 4816.67,3743.05 4806.67,3743.05 4794.17,3728.05 4823.32,3728.05
  region net $1N569: 4816.67,3812.62 4806.67,3812.62 4795.73,3766.13 4827.22,3766.13
  region net $1N569: 4816.67,3751.13 4827.22,3766.13 4795.73,3766.13 4806.67,3751.13
  region net $1N567: 4739.62,3750.86 4749.62,3750.86 4762.12,3765.86 4732.78,3765.86
  region net $1N568: 4713.87,3860 4713.87,3850 4728.87,3837.5 4728.87,3867.78
  region net $1N568: 4743.52,3882.78 4731.02,3867.78 4760.37,3867.78 4753.52,3882.78
  region net $1N569: 4816.67,3883.05 4806.67,3883.05 4794.17,3868.05 4823.32,3868.05
  region net $1N569: 4816.67,3821.55 4823.32,3868.05 4794.17,3836.55 4806.67,3821.55
  region net $1N569: 4816.67,3891.13 4827.22,3906.13 4795.73,3906.13 4806.67,3891.13
  region net $1N568: 4743.52,3890.86 4753.52,3890.86 4764.27,3905.86 4732.78,3905.86
  region net 5V: 4374.71,3377.41 4359.71,3384.22 4359.71,3360.6 4374.71,3367.41
  region net 5V: 4324.38,3338.1 4339.38,3338.1 4358.13,3360.6 4312.47,3360.6
  region net $1N567: 4374.71,3417.41 4374.71,3427.41 4359.71,3434.22 4359.71,3410.6
  region net $1N568: 4370.32,3483.25 4367.76,3494.83 4359.71,3484.22 4359.71,3460.6
  region net $1N569: 4331.09,3549.22 4318.59,3534.22 4353.59,3534.22 4341.09,3549.22
  region net $1N559: 4117.09,3564.22 4097.09,3564.22 4083.47,3534.22 4130.71,3534.22
  region net $1N562: 4072.59,3462.41 4083.47,3460.6 4083.47,3484.22 4072.59,3482.41
  region net $1N563: 4053.47,3432.41 4053.47,3412.41 4083.47,3410.6 4083.47,3434.22
  region net VIN: 4053.47,3382.41 4053.47,3362.41 4083.47,3360.6 4083.47,3384.22
  region net $1N559: 3352.11,3315.63 3352.11,3335.63 3322.11,3347.92 3322.11,3303.34
  region net $1N570: 3297.5,3435 3282.5,3435 3267.89,3426.66 3316.25,3426.66
  region net $1N562: 3558.22,3510.98 3578.22,3510.98 3601.93,3540.98 3543.47,3540.98
  region net $1N562: 3631.93,3565 3631.93,3585 3601.93,3609.02 3601.93,3540.98
  region net VIN: 3608.4,3260 3608.4,3240 3638.4,3235.29 3638.4,3285
  region net VIN: 3736.43,3254.52 3736.43,3274.52 3706.43,3293.76 3706.43,3235.29
  region net VIN: 3852.45,3254.52 3852.45,3274.52 3822.45,3293.76 3822.45,3235.29
  region net VIN: 3724.42,3254.52 3754.42,3235.29 3754.42,3293.76 3724.42,3274.52
  region net VIN: 3840.45,3254.52 3870.45,3235.29 3870.45,3293.76 3840.45,3274.52
  region net VIN: 3968.48,3254.52 3968.48,3274.52 3938.48,3293.76 3938.48,3235.29
  region net VIN: 3956.47,3254.52 3986.47,3235.29 3986.47,3293.76 3956.47,3274.52
  region net VIN: 4010.49,3323.76 3986.47,3293.76 4054.5,3293.76 4030.49,3323.76
  region net $1N563: 4030.35,3432.41 4000.35,3457.41 4000.35,3412.01 4030.35,3412.41
  region net VCCBAT: 3705,3390 3725,3390 3750,3412.01 3680,3412.01
  region net VCCBAT: 3398.01,3475 3398.01,3455 3428.01,3431.52 3428.01,3498.48
  region net VCCBAT: 3483.26,3410.3 3496.76,3425.08 3475.55,3498.48 3475.55,3431.52
  region net $1N562: 3558.22,3528.48 3544.45,3498.48 3591.99,3498.48 3578.22,3528.48
  region net VCCBAT: 3631.93,3370 3601.93,3394.02 3601.93,3325.98 3631.93,3350
  region net $1N570: 3158.64,3485.3 3120.87,3478.27 3168.11,3447.05 3169.24,3474.7
  region net 3V3: 3479.37,4669.89 3491.87,4673.43 3456.87,4673.43 3469.37,4669.89
  region net $1N4383: 4797.01,3990.34 4782.01,4002.84 4782.01,3974.46 4797.01,3980.34
  region net 3V3: 4795,4052.16 4782.01,4065.54 4782.01,4033.78 4795,4037.16
  region net TXD0: 4426.2,4525 4434.46,4512.99 4434.46,4547.01 4426.2,4535
  region net $1N4471: 4534.66,4535 4525.54,4547.01 4525.54,4512.99 4534.66,4525
  region net RXD0: 4420.34,4465 4434.46,4452.99 4434.46,4487.01 4420.34,4475
  region net $1N4541: 4529.66,4475 4525.54,4487.01 4525.54,4452.99 4529.66,4465
  region net EN: 3449.12,4582.39 3480.54,4592.99 3448.78,4613.87 3438.18,4585.59
  region net 3V3: 3431.82,4624.41 3430.88,4637.61 3402.6,4627.01 3421.22,4592.99
  region net 3V3: 4557.16,4680.49 4565.54,4702.99 4533.78,4702.99 4542.16,4680.49
  region net IO0: 4485.34,4687.99 4495.34,4687.99 4506.22,4702.99 4474.46,4702.99
  region net IO0: 4463.86,4729.41 4474.46,4702.99 4488.08,4737.01 4463.86,4743.55
  region net IO0: 4434.88,4783.23 4444.88,4783.23 4457.38,4798.23 4422.38,4798.23
  region net EN: 3325,4778.23 3335,4778.23 3347.5,4793.23 3319.76,4793.23
  region net VCCBAT: 3305,3500 3325,3500 3350,3509.57 3280,3509.57
  region net D-: 4519.33,3435.47 4534.33,3434.56 4534.33,3446.38 4519.33,3445.47
  region net D+: 4590,3465.16 4585.51,3466.07 4585.51,3454.25 4590,3455.16
  region net D-: 4519.33,3484.84 4519.33,3474.84 4534.33,3473.93 4534.33,3485.75
  region net D+: 4592.2,3494.53 4592.2,3504.53 4585.51,3505.44 4585.51,3493.62
  region net D+: 4524.92,3494.53 4534.33,3493.62 4534.33,3505.44 4524.92,3504.53
  region net 3V3: 3139.29,4169.24 3126.21,4135.09 3136.03,4123.69 3169.63,4134
  region net IO32: 3423.5,4172.5 3401,4191.25 3401,4138.75 3423.5,4157.5
  region net 3V3: 4026.57,3739.66 4026.57,3759.66 3943.43,3782.13 3943.43,3726.61
  region net 3V3: 3913.43,3739.66 3943.43,3726.61 3943.43,3782.13 3913.43,3759.66
  region net $1N8242: 3770.46,3674.62 3770.46,3694.62 3740.46,3700.37 3740.46,3668.87
  region net 3V3: 3852.01,3739.66 3852.01,3759.66 3822.01,3765.54 3822.01,3733.78
  region net $1N8242: 3757.99,3674.62 3787.99,3674.46 3787.99,3706.22 3757.99,3694.62
  region net IO2: 4662.99,3990 4662.99,3980 4677.99,3974.46 4677.99,4002.5
  region net $1N8352: 4700,4074.66 4690,4074.66 4677.99,4065.54 4712.01,4065.54
  region net 3V3: 3249.9,4462.87 3267.5,4445 3282.5,4445 3300.1,4462.87
  region net 3V3: 3420.23,3687.5 3397.73,3706.25 3397.73,3654 3420.23,3672.5
  region net 3V3: 3319.82,3721.3 3335.73,3678.88 3372.86,3716 3330.43,3731.91
  region net 3V3: 3574.33,4574.93 3574.33,4564.93 3584.34,4552.43 3584.34,4587.43
  region net 3V3: 3689.51,4562.43 3689.51,4577.43 3667.01,4588.63 3667.01,4551.22
  region net EN: 3569.34,4514.93 3584.34,4502.43 3584.34,4537.43 3569.34,4524.93
  region net EN: 3682.01,4514.93 3682.01,4524.93 3667.01,4537.43 3667.01,4502.43
  region net IO32: 3561.84,4277.43 3561.84,4262.43 3584.34,4251.22 3584.34,4288.63
  region net IO2: 4238.71,3905.09 4238.71,3915.09 4223.71,3927.59 4223.71,3892.59
  region net IO0: 4390.66,3964.93 4390.66,3974.93 4375.66,3987.43 4375.66,3952.43
  region net IO4: 4277.99,4025 4277.99,4015 4292.99,4002.5 4292.99,4037.5
  region net IO16: 4277.99,4074.93 4277.99,4064.93 4292.99,4052.43 4292.99,4087.43
  region net IO17: 4277.99,4125 4277.99,4115 4292.99,4102.5 4292.99,4137.5
  region net IO5: 4277.99,4165 4292.99,4152.5 4292.99,4187.5 4277.99,4175
  region net IO18: 4277.99,4225 4277.99,4215 4292.99,4202.5 4292.99,4237.5
  region net IO19: 4277.99,4275 4277.99,4265 4292.99,4252.5 4292.99,4287.5
  region net IO21: 4277.99,4375 4277.99,4365 4292.99,4352.5 4292.99,4387.5
  region net RXD0: 4386.27,4428.86 4386.27,4443 4364.22,4438.63 4375.66,4401.22
  region net TXD0: 4386.27,4483 4386.27,4497.14 4360.08,4488.63 4375.66,4451.22
  region net IO22: 4279.93,4514.93 4292.99,4502.43 4292.99,4537.43 4279.93,4524.93
  region net VIN: 4264.35,3808.03 4264.35,3828.03 4234.35,3831.26 4234.35,3804.8
  region net VBUS: 4437.5,3329.12 4421.38,3306.62 4468.62,3306.62 4452.5,3329.12
  region net 5V: 4437.5,3202.01 4421.38,3180.63 4468.62,3180.63 4452.5,3202.01
  region net 3V3: 3998.03,3739.66 4023.89,3749.43 4032.89,3784.66 3992.67,3759.66
  region net D+: 4495.99,4007.06 4500,3994.59 4510,3994.59 4514.01,4007.06
  region net D+: 4512.94,4080.99 4519.14,4085 4519.14,4095 4512.94,4099.01
  region net $1N559: 3699.92,3608.75 3715.5,3610 3715.5,3630 3699.92,3631.25
  region net $1N559: 3355.56,3336.66 3339.92,3335.63 3339.08,3315.63 3354.61,3314.18
  region net VIN: 3594.92,3238.75 3610.5,3240 3610.5,3260 3594.92,3261.25
  region net VIN: 4370.08,3796.25 4354.5,3795 4354.5,3775 4370.08,3773.75
  region net 5V: 4798.52,4418.45 4794.3,4430.68 4784.3,4430.1 4780.56,4417.4
  region net 5V: 4613.02,4370.75 4607.04,4359.11 4614.11,4352.04 4625.75,4358.02
  region net RTS: 4487.94,4591 4500.4,4595 4500.4,4605 4487.94,4609
  region net DTR: 4487.94,4401 4500.4,4405 4500.4,4415 4487.94,4419
  region net IO0: 4543.02,4355.75 4537.04,4344.11 4544.11,4337.04 4555.75,4343.02
  region net IO0: 4555.75,4626.98 4544.11,4632.96 4537.04,4625.89 4543.02,4614.25
  region net EN: 3717.01,4528.95 3704.57,4524.93 3704.63,4514.93 3717.12,4510.95
  region net $1N569: 4411,3887.06 4415,3874.6 4425,3874.6 4429,3887.06
  region net $1N569: 4547.94,3941 4560.4,3945 4560.4,3955 4547.94,3959
  region net $1N568: 4403.02,3650.75 4397.04,3639.11 4404.11,3632.04 4415.75,3638.02
  region net $1N567: 4406,3552.06 4410,3539.6 4420,3539.6 4424,3552.06
  region net $1N568: 4556.98,3774.25 4562.96,3785.89 4555.89,3792.96 4544.25,3786.98
  region net $1N567: 4556.98,3694.25 4560.56,3703.49 4553.49,3710.56 4544.25,3706.98
  region net 3V3: 4835.75,4681.98 4825.88,4689.73 4815.27,4679.12 4823.02,4669.25
  region net 3V3: 4785.75,4371.98 4774.11,4377.96 4767.04,4370.89 4773.02,4359.25
  region net 3V3: 4774.8,4353.68 4775.49,4340.92 4790.49,4338.37 4792.54,4350.67
  region net IO4: 4197.94,4011 4210.4,4015 4210.4,4025 4197.94,4029
  region net IO22: 4201.98,4429.25 4207.96,4440.89 4200.89,4447.96 4189.25,4441.98
  region net IO21: 4197.94,4361 4210.4,4365 4210.4,4375 4197.94,4379
  region net IO19: 4197.94,4261 4210.4,4265 4210.4,4275 4197.94,4279
  region net IO18: 4197.94,4211 4210.4,4215 4210.4,4225 4197.94,4229
  region net IO5: 4197.94,4161 4210.4,4165 4210.4,4175 4197.94,4179
  region net IO17: 4197.94,4111 4210.4,4115 4210.4,4125 4197.94,4129
  region net IO16: 4197.88,4060.95 4210.37,4064.93 4210.43,4074.93 4197.99,4078.95
  region net 3V3: 3724.25,4558.02 3734.12,4550.27 3744.73,4560.88 3736.98,4570.75
  region net 3V3: 3717.01,4578.95 3704.55,4577.43 3704.65,4562.43 3717.12,4560.95
  region net 3V3: 4558.77,4678.19 4557.16,4690.61 4542.16,4690.19 4540.78,4677.68
  region net IO2: 4408.02,3950.75 4402.04,3939.11 4409.11,3932.04 4420.75,3938.02
  region net IO2: 4547.94,3976 4560.4,3980 4560.4,3990 4547.94,3994
  region net D+: 4685.87,4384.46 4695.87,4384.46 4696.39,4401.78 4685.36,4401.78
  region net D-: 4705.57,4384.46 4715.57,4384.46 4716.09,4401.78 4705.06,4401.78
  region net 3V3: 4749.97,4418.99 4731.8,4431.49 4731.8,4396.49 4749.97,4408.99
  region net 3V3: 4744.97,4395.03 4754.97,4395.03 4755.49,4401.78 4744.46,4401.78
  region net 3V3: 4730.27,4418.99 4730.27,4408.99 4748.44,4396.49 4748.44,4431.49
  region net 5V: 4784.3,4432.8 4794.3,4432.8 4806.8,4451.78 4771.8,4451.78
  region net $1N4383: 4814.02,4468.01 4814.02,4478.01 4801.51,4478.52 4801.51,4467.5
  region net $1N4471: 4562.93,4517.41 4562.93,4507.41 4580.25,4506.9 4580.25,4517.92
  region net $1N4541: 4562.93,4497.71 4562.93,4487.71 4580.25,4487.2 4580.25,4498.22
  region net DTR: 4567.45,4448.31 4580.25,4447.8 4580.25,4458.82 4567.45,4458.31
Bottom Layer:
  region net VIN: 3465,3185 3630,3185 3630,3295 3465,3295
  region net $1N5682: 4066.02,4480 4066.02,4470 4081.02,4463.82 4081.02,4491.38
  region net DTR: 4145.24,4547.4 4145.24,4557.4 4130.24,4566.18 4130.24,4538.62
  region net DTR: 4066.02,4560 4066.02,4550 4081.02,4538.62 4081.02,4566.18
  region net IO0: 4223.98,4520 4208.98,4528.78 4208.98,4501.22 4223.98,4510
  region net $1N5646: 3913.98,4547.4 3913.98,4557.4 3898.98,4566.18 3898.98,4538.62
  region net RTS: 3913.98,4482.6 3898.98,4491.38 3898.98,4463.82 3913.98,4472.6
  region net RTS: 3842.91,4501.99 3849.76,4477.46 3885.34,4491.38 3857.05,4501.99
  region net EN: 3756.02,4515 3771.02,4502.5 3771.02,4528.78 3756.02,4525
  region net DTR: 4050.54,4560 4035.54,4572.01 4035.54,4537.99 4050.54,4550
  region net $1N5646: 3929.46,4547.4 3944.46,4537.99 3944.46,4569.9 3929.46,4557.4
  region net RTS: 3929.46,4482.6 3929.46,4472.6 3944.46,4460.1 3944.46,4492.01
  region net $1N5682: 4050.54,4480 4035.54,4492.01 4035.54,4457.99 4050.54,4470
  region net VIN: 3125.63,4286.23 3136.23,4275.63 3178.66,4291.54 3141.54,4328.66
  region net IO19: 3308.4,4322.9 3318.76,4361.69 3311.69,4368.76 3272.9,4358.4
  region net IO18: 3372.9,4291.6 3411.69,4281.24 3418.76,4288.31 3408.4,4327.1
  region net IO16: 3408.4,3842.9 3418.76,3881.69 3411.69,3888.76 3372.9,3878.4
  region net IO17: 3308.4,3842.9 3318.76,3881.69 3311.69,3888.76 3272.9,3878.4
  region net VIN: 3141.55,3845.92 3130.12,3809.07 3141.1,3798.83 3178.27,3811.7
  region net 3V3: 3308.4,4482.9 3320.53,4519.92 3309.92,4530.53 3272.9,4518.4
  region net IO21: 3372.9,4451.6 3411.69,4441.24 3418.76,4448.31 3408.4,4487.1
  region net IO22: 3497.13,4459.9 3531.89,4480 3531.89,4490 3497.13,4510.1
  region net IO4: 3297.44,3680.76 3308.88,3716.81 3302.34,3724.41 3267.1,3716
  region net IO5: 3512,4049.07 3483.72,4038.46 3508.46,4013.72 3519.07,4042
  region net VIN: 3141.6,4007.1 3129.47,3970.08 3140.08,3959.47 3177.1,3971.6
  region net D+: 4514.01,4022.94 4510,4035.41 4500,4035.41 4495.99,4022.94
  region net D+: 4495.99,4082.06 4500,4069.59 4510,4069.59 4514.01,4082.06
  region net $1N559: 3675.06,3618.61 3665.47,3606.33 3681.83,3594.4 3693.25,3605.36
  region net $1N559: 3374.92,3313.75 3390.5,3315 3390.5,3335 3374.92,3336.25
  region net VIN: 3575.08,3261.25 3559.5,3257.5 3559.5,3242.5 3575.08,3238.75
  region net VIN: 3594.92,3238.75 3610.5,3240 3610.5,3260 3594.92,3261.25
  region net VIN: 4368.75,3775.08 4370,3759.5 4390,3759.5 4391.25,3775.08
  region net 5V: 4778.02,4410.75 4772.04,4399.11 4779.11,4392.04 4790.75,4398.02
  region net 5V: 4632.94,4361 4645.4,4365 4645.4,4375 4632.94,4379
  region net RTS: 4472.06,4609 4459.6,4605 4459.6,4595 4472.06,4591
  region net DTR: 4472.06,4419 4465.86,4415 4465.86,4405 4472.06,4401
  region net IO0: 4547.06,4364 4534.6,4360 4534.6,4350 4547.06,4346
  region net IO0: 4564,4362.94 4560,4375.4 4550,4375.4 4546,4362.94
  region net IO0: 4546,4607.06 4550,4594.6 4560,4594.6 4564,4607.06
  region net EN: 3732.94,4511 3745.4,4515 3745.4,4525 3732.94,4529
  region net $1N569: 4431.98,3894.25 4437.96,3905.89 4430.89,3912.96 4419.25,3906.98
  region net $1N569: 4532.06,3959 4519.6,3955 4519.6,3945 4532.06,3941
  region net $1N568: 4426.98,3649.25 4432.96,3660.89 4425.89,3667.96 4414.25,3661.98
  region net $1N567: 4426.67,3562.81 4431.45,3574.38 4422.2,3579.27 4410.75,3571.22
  region net $1N568: 4533.78,3779.25 4525.73,3767.8 4530.62,3758.55 4542.19,3763.33
  region net $1N567: 4533.02,3695.75 4527.04,3684.11 4534.11,3677.04 4545.75,3683.02
  region net 3V3: 4826,4662.06 4827.5,4649.6 4842.5,4649.6 4844,4662.06
  region net 3V3: 4796.98,4359.25 4804.73,4369.12 4794.12,4379.73 4784.25,4371.98
  region net IO4: 4182.06,4029 4169.6,4025 4169.6,4015 4182.06,4011
  region net VIN: 3544.92,3238.75 3560.5,3242.5 3560.5,3257.5 3544.92,3261.25
  region net VIN: 3525.08,3261.25 3509.5,3257.5 3509.5,3242.5 3525.08,3238.75
  region net VIN: 3494.92,3238.75 3510.5,3242.5 3510.5,3257.5 3494.92,3261.25
  region net VIN: 3475.08,3261.25 3459.5,3257.5 3459.5,3242.5 3475.08,3238.75
  region net IO22: 4182.06,4439 4169.6,4435 4169.6,4425 4182.06,4421
  region net IO21: 4190.75,4381.98 4179.11,4387.96 4172.04,4380.89 4178.02,4369.25
  region net IO19: 4182.06,4279 4169.6,4275 4169.6,4265 4182.06,4261
  region net IO18: 4182.06,4229 4169.6,4225 4169.6,4215 4182.06,4211
  region net IO5: 4182.06,4179 4169.6,4175 4169.6,4165 4182.06,4161
  region net IO17: 4182.06,4129 4169.6,4125 4169.6,4115 4182.06,4111
  region net IO16: 4182.06,4079 4169.6,4075 4169.6,4065 4182.06,4061
  region net 3V3: 3717.06,4579 3704.6,4577.5 3704.6,4562.5 3717.06,4561
  region net 3V3: 3736.98,4569.25 3744.73,4579.12 3734.12,4589.73 3724.25,4581.98
  region net 3V3: 4538.02,4670.75 4530.27,4660.88 4540.88,4650.27 4550.75,4658.02
  region net IO2: 4431.98,3949.25 4437.96,3960.89 4430.89,3967.96 4419.25,3961.98
  region net IO2: 4532.06,3994 4519.6,3990 4519.6,3980 4532.06,3976